# Altium PCB SPT3G_AdapterBoard.PcbDoc
Units mil, origin at the board's own origin, x right, y up, seen from the top; angles counter-clockwise.
Board outline 1437.49 x 1831.15 mil, 6 copper layers (Top Layer, Internal Plane 1, Signal Layer 1, Signal Layer 2, Internal Plane 2, Bottom Layer), stack 48.468 mil thick; 8 components, 17 nets, 43 pads, 128 vias.
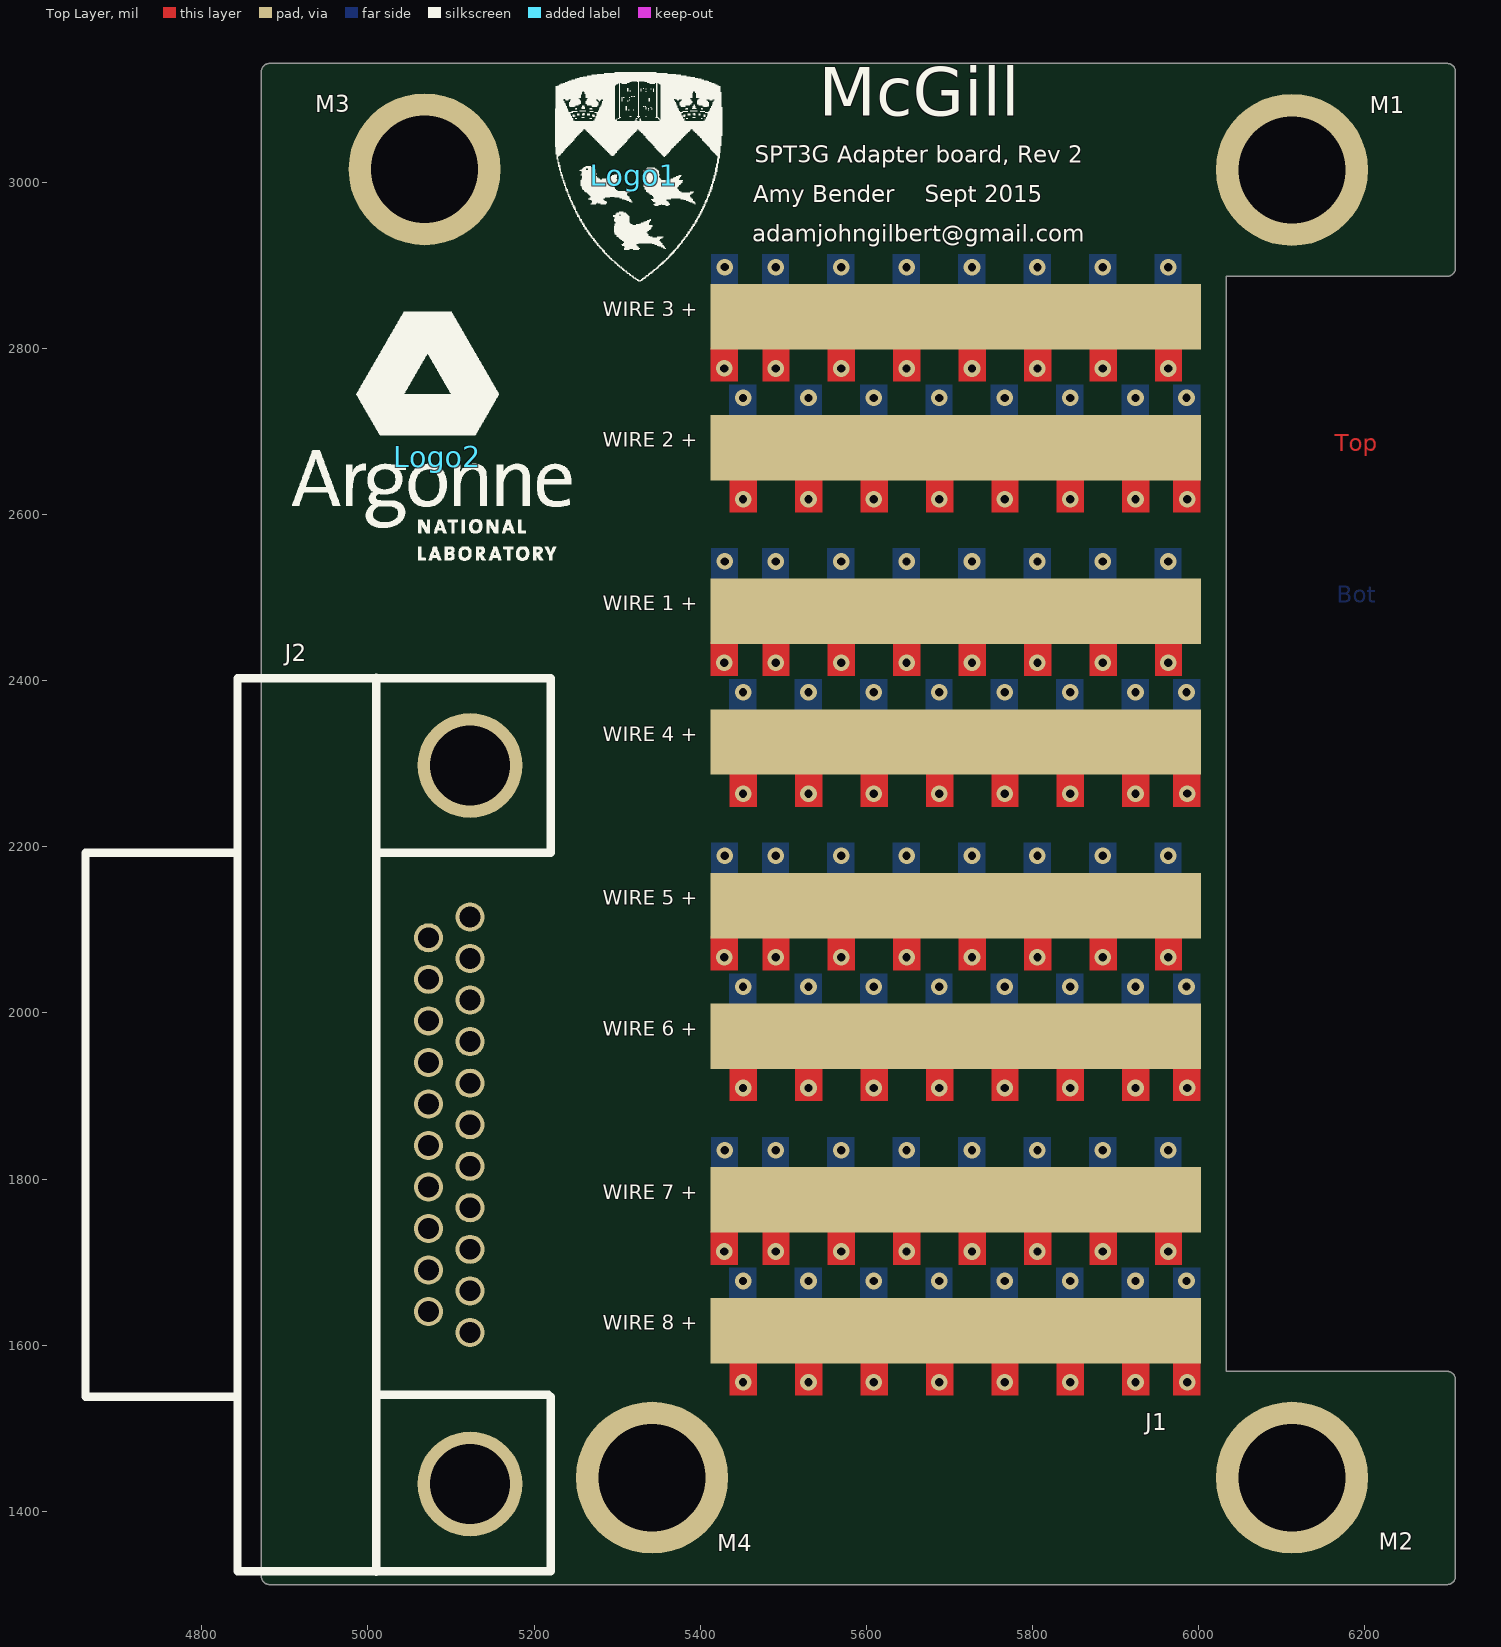
[diagram p0: Top Layer view]
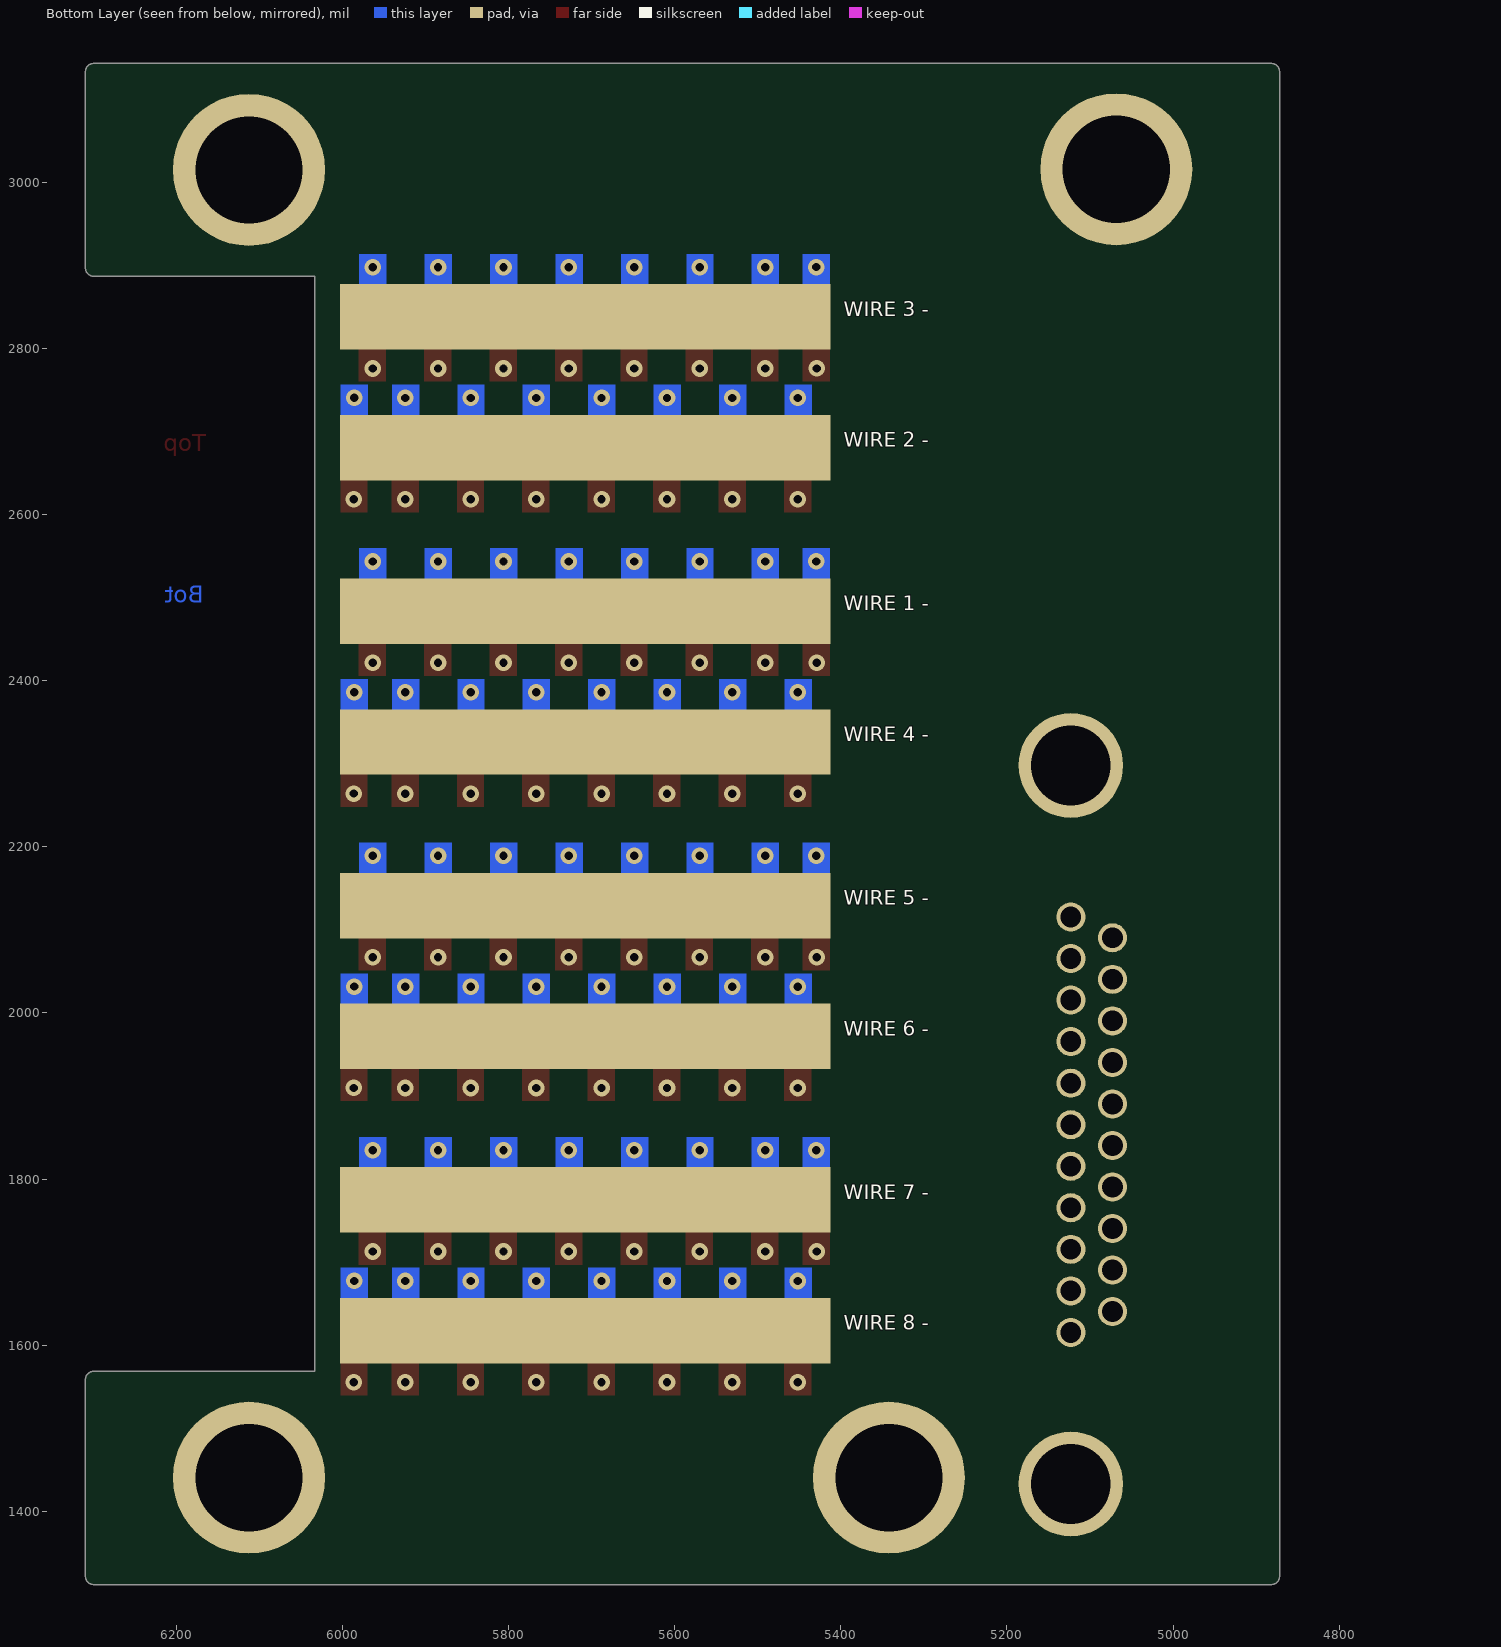
[diagram p1: Bottom Layer view, seen from below]
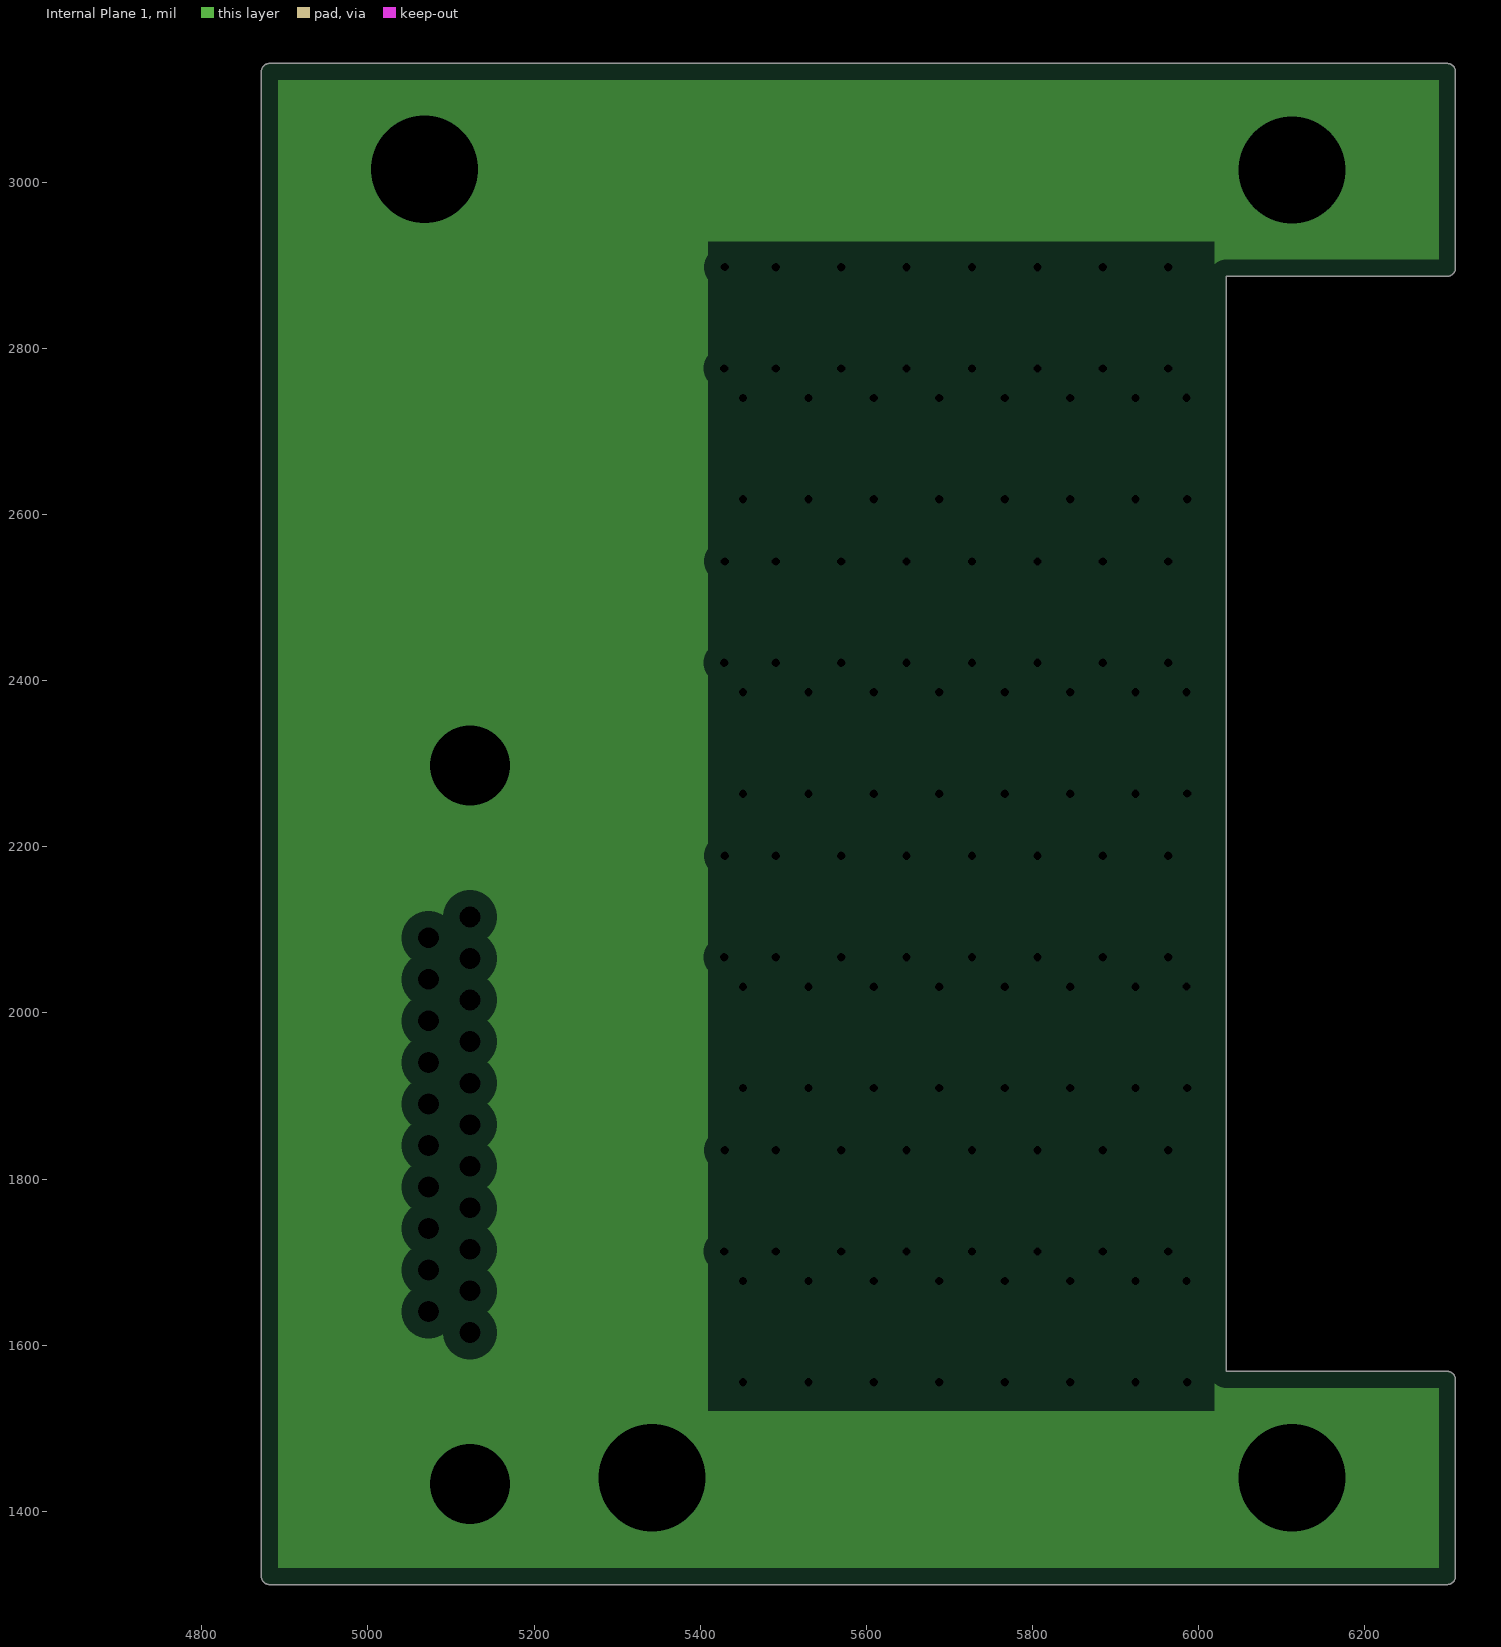
[diagram p2: Internal Plane 1, clearances drawn from the general rule]
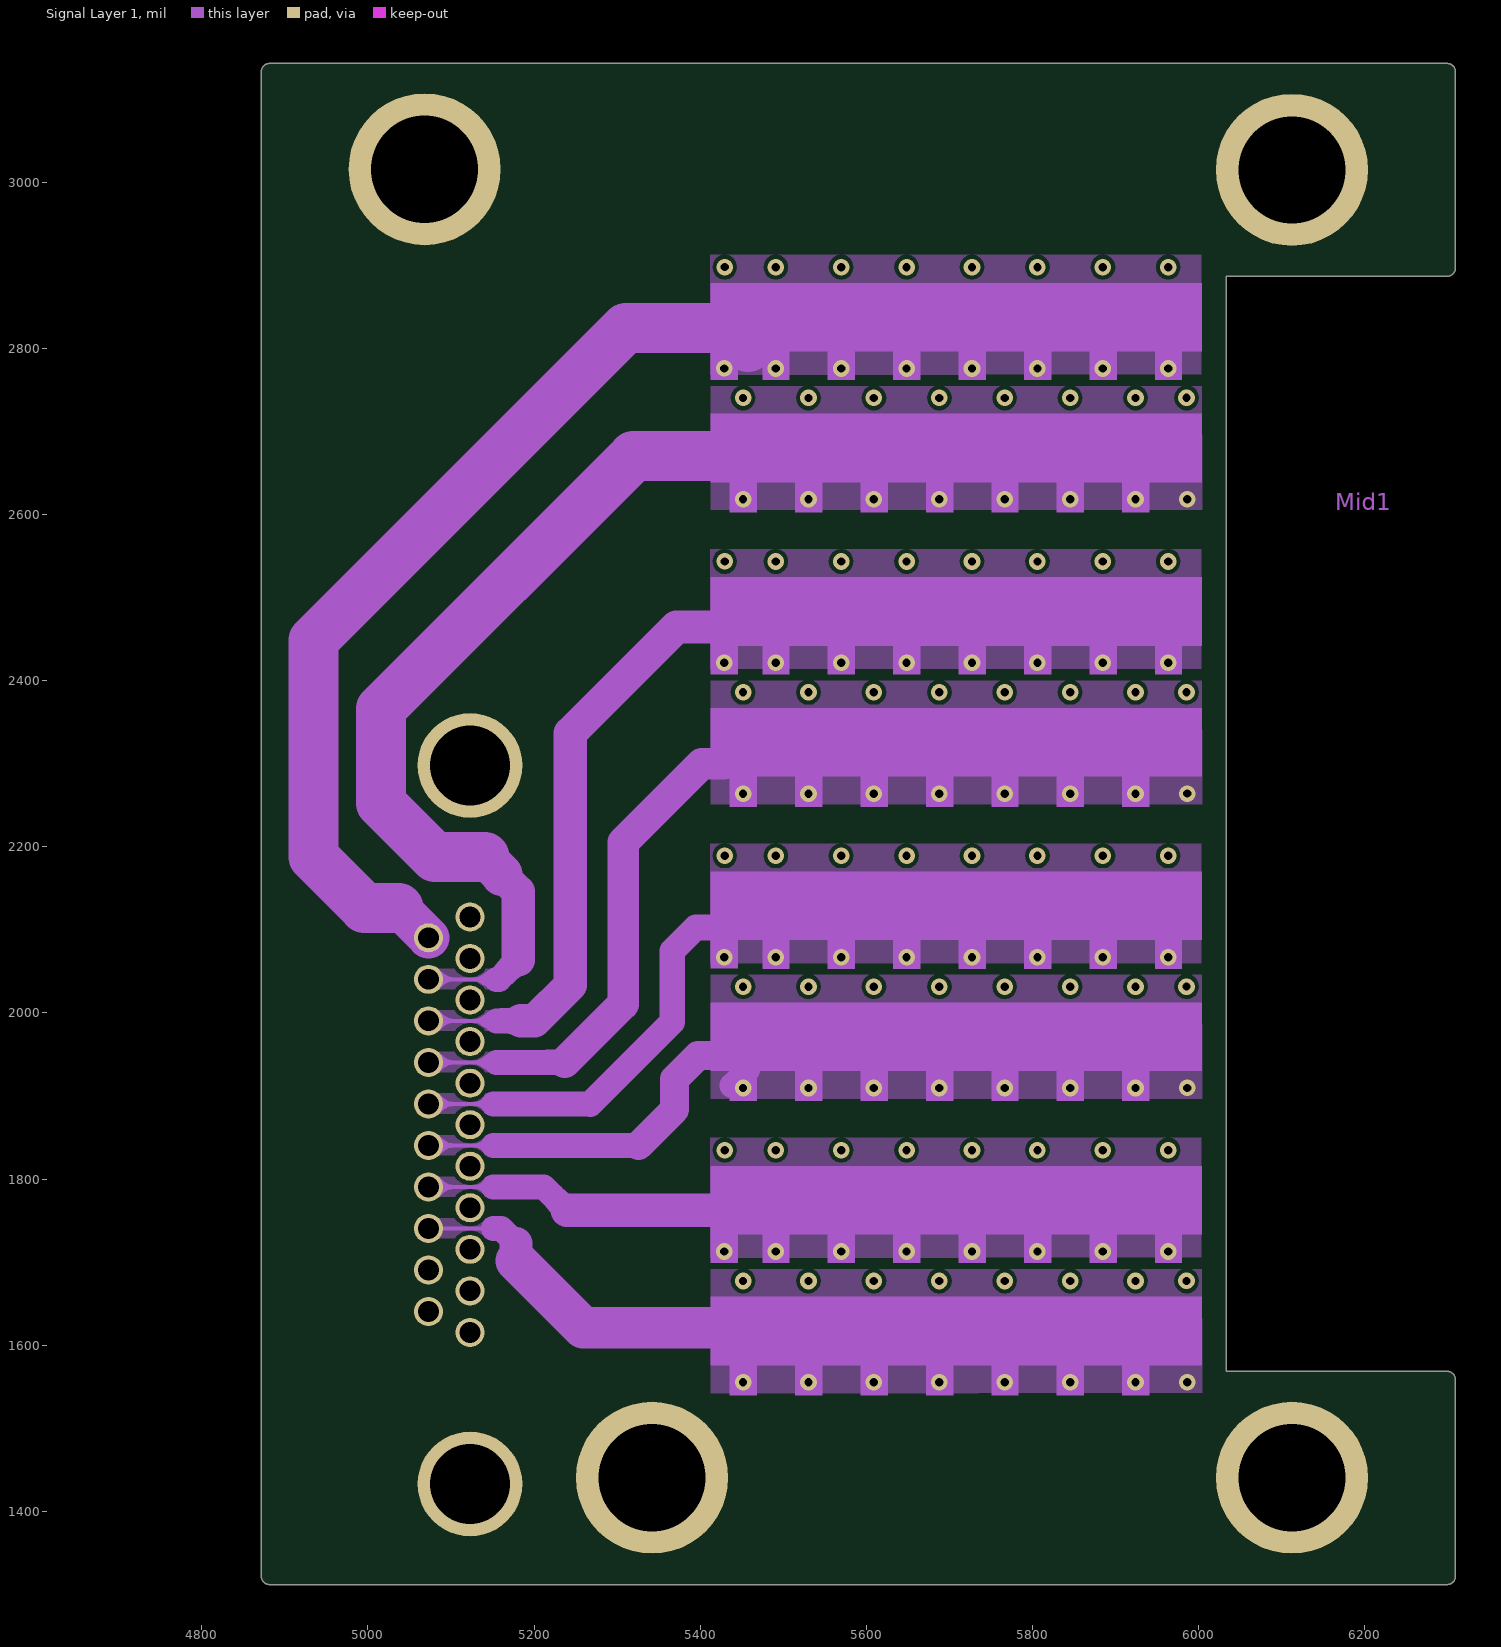
[diagram p3: Signal Layer 1]
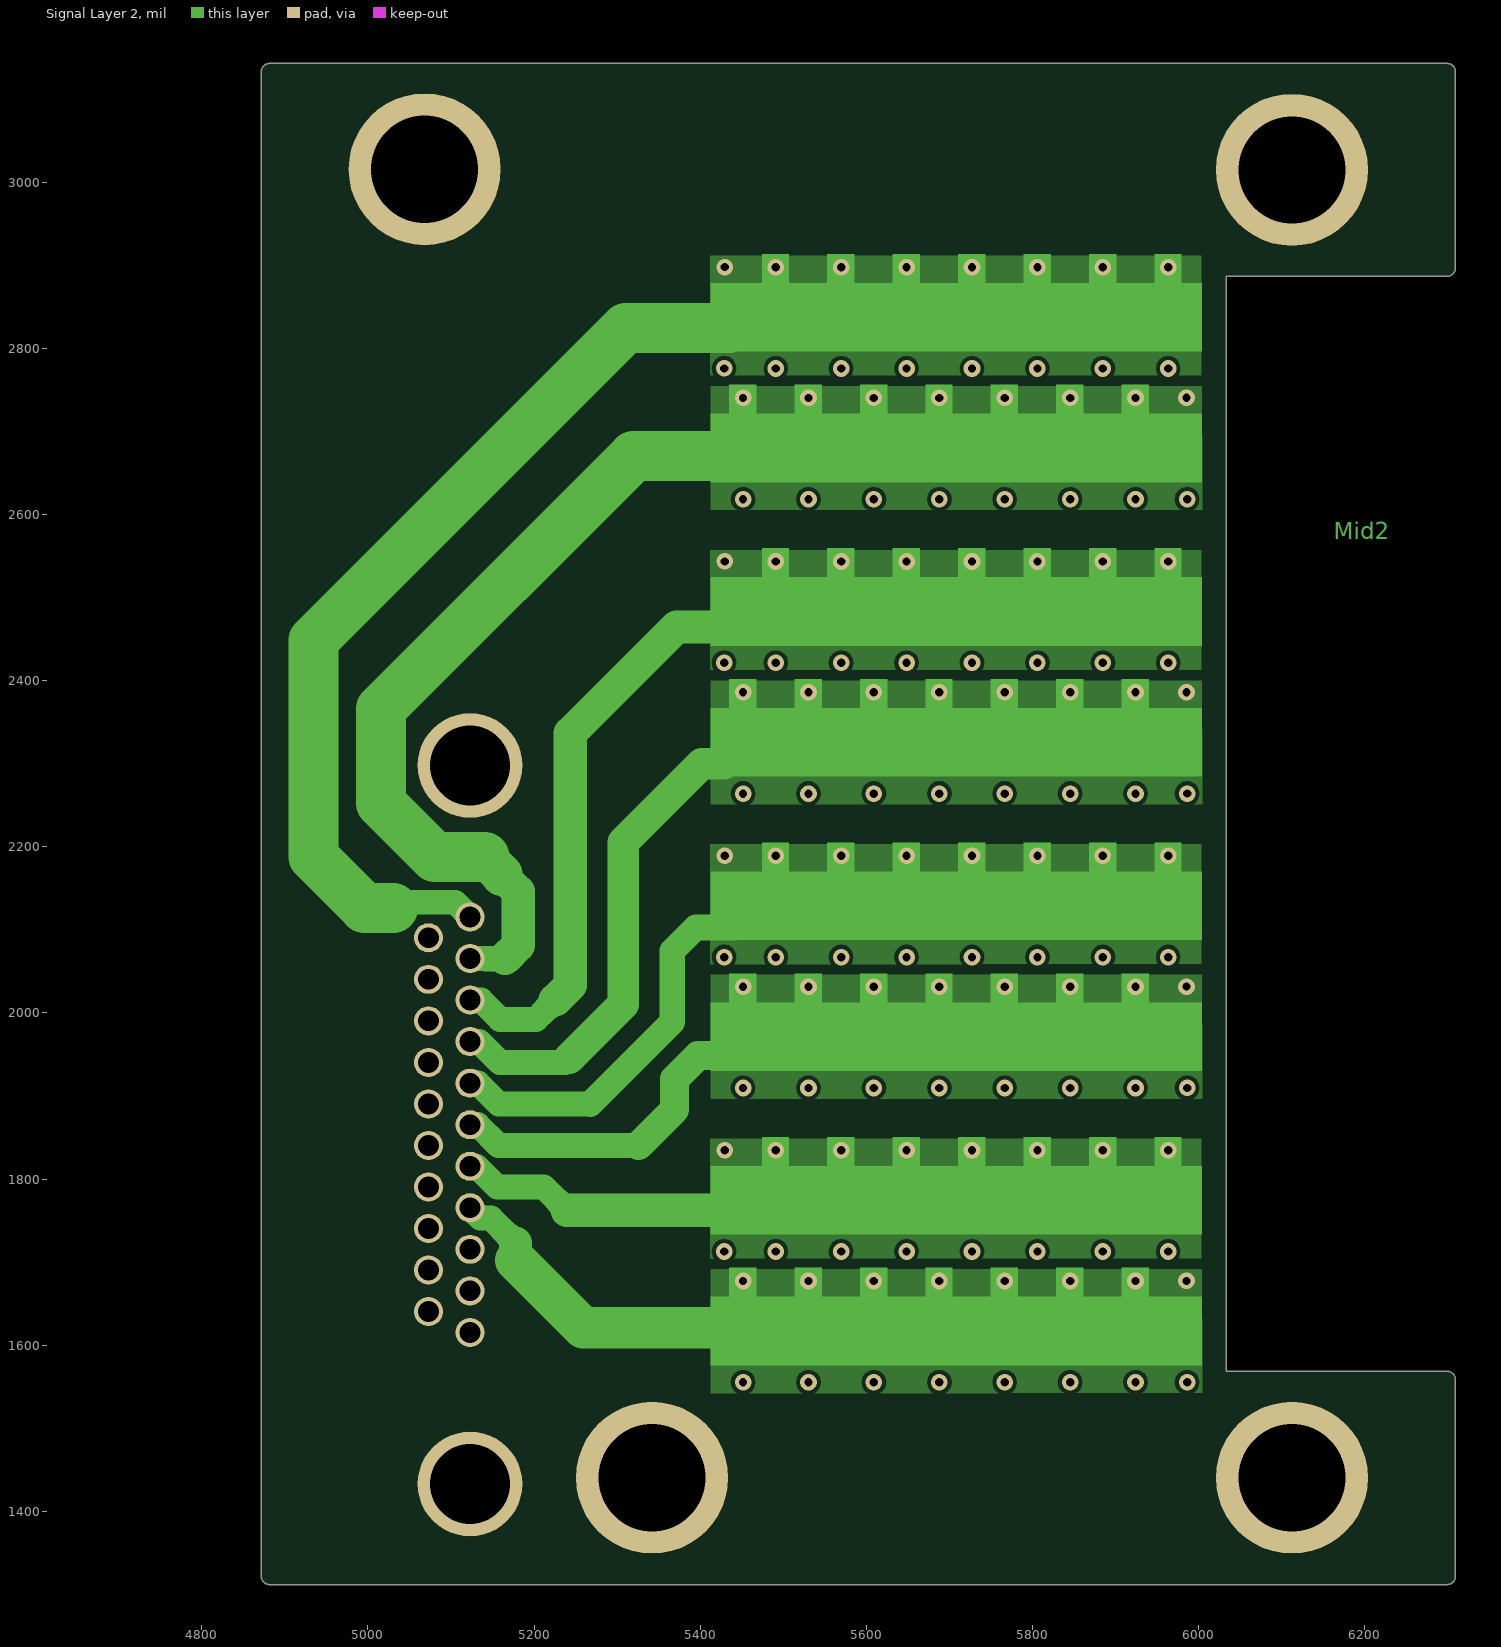
[diagram p4: Signal Layer 2]
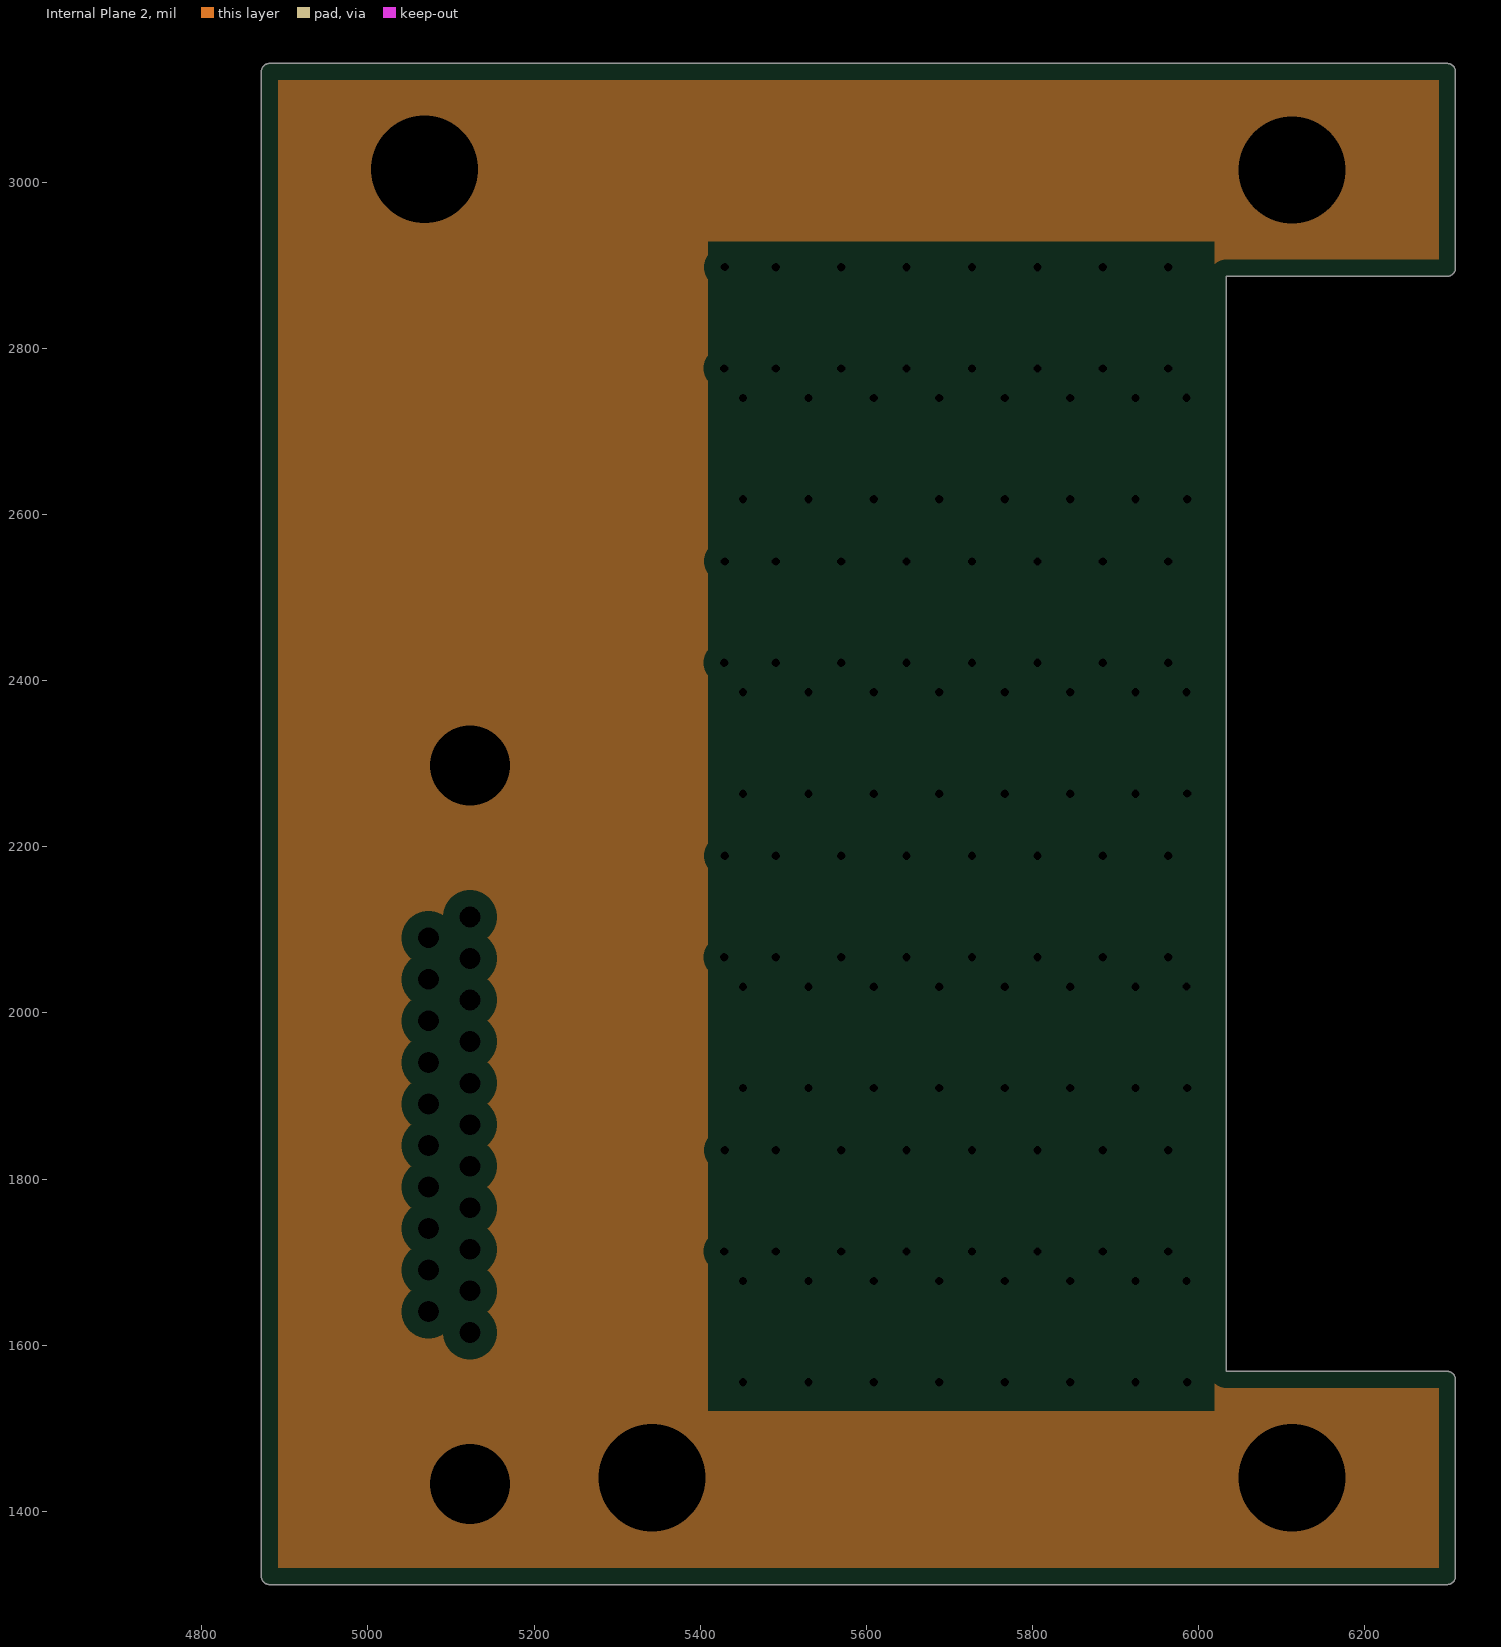
[diagram p5: Internal Plane 2, clearances drawn from the general rule]

## Layer stack, top to bottom
Top Solder: solder mask 0.4, Solder Resist, Dk 3.5
Top Layer: signal copper 1.4
Dielectric 1: core 10, FR-4, Dk 4.2
Internal Plane 1: plane copper 1.417, net GND
Dielectric 4: prepreg 5, Dk 4.2
Signal Layer 1: signal copper 1.417
Dielectric 3: core 10, Dk 4.2
Signal Layer 2: signal copper 1.417
Dielectric 5: prepreg 5, Dk 4.2
Internal Plane 2: plane copper 1.417, net GND
Dielectric 2: core 10, Dk 4.2
Bottom Layer: signal copper 1.4
Bottom Solder: solder mask 0.4, Solder Resist, Dk 3.5

## Board outline
4871.73,1321.95 ccw(c4881.75,1321.95) 4881.75,1311.94 6299.21,1311.94 ccw(c6299.21,1321.95) 6309.23,1321.95 ccw(c6299.21,1321.95) 6309.22,1322.2 ccw(c6299.21,1322.46) 6309.23,1322.46 6309.23,1558.68 ccw(c6299.21,1558.68) 6299.15,1568.69 6033.44,1568.69 6033.44,2886.84 6299.21,2886.84 ccw(c6299.21,2896.85) 6309.23,2896.85 6309.23,3133.07 ccw(c6299.21,3133.07) 6299.21,3143.09 4881.75,3143.09 ccw(c4881.75,3133.07) 4871.73,3133.07

## Design rules (kind name [scope] priority, off if disabled: settings)
Clearance Clearance_1 [All vs HasFootprint('McGillLogo1')] p1: gap=5
Clearance [All] p2: gap=5
ComponentClearance [(HasFootprint('ArgonneLogo') OR HasFootprint('MCGILLLOGO1'))] p1: gap=0 collisioncheckmode=3 verticalgap=0 showdistances=FALSE
ComponentClearance ComponentClearance_1 [All] p2: gap=10 collisioncheckmode=3 verticalgap=10 showdistances=FALSE
HoleSize [All] p1: absolutevalues=TRUE maxlimit=150 minlimit=1 maxpercent=80.000 minpercent=20.000
MinimumSolderMaskSliver [All] p1: minsoldermaskwidth=3
PlaneClearance [All] p1: clearance=20
PlaneConnect [All] p1: planeconnectstyle=Relief reliefexpansion=20 reliefentries=4 reliefconductorwidth=10 reliefairgap=10
PolygonConnect [All] p1: connectstyle=Direct reliefconductorwidth=10 reliefentries=4 polygonreliefangle="90 Angle" airgapwidth=10
RoutingVias [All] p1: holewidth=28 width=50 viastyle="Through Hole" minholewidth=10 minwidth=20 maxholewidth=28 maxwidth=50
SilkToBoardRegionClearance [All] p1 off:
SilkToSilkClearance [All] p1: silktosilkclearance=5
SolderMaskExpansion [All] p1: expansion=3
Width [All] p1: maxlimit=100 minlimit=5 preferedwidth=10 minimp=50.000000 maximp=50.000000 favimp=50.000000
23 further rules are at their usual default settings.

## Components (designator, comment, footprint, x,y, rotation, side; value= is the part's Value field where it differs from the comment)
J1 "Stripline16 2mm x 15mm pads" Stripline16 5707.66,2129.34 r180 top
J2 "Omnetics MMDS-021-B02-R2" MMDS-021-B02-R2 5122.99,1865.53 r90 top
Logo1 "McGillLogo" MCGILLLOGO1 5320.34,3008.35 r0 top
Logo2 "ArgonneLogo" ArgonneLogo 5083.72,2669.6 r0 top
M1 "MountingHole" MountingHole#1 6112.36,3014.96 r0 top
M2 "MountingHole" MountingHole#1 6112.36,1440.57 r0 top
M3 "MountingHole" MountingHole#2 5068.3,3014.96 r0 top
M4 "MountingHole" MountingHole#3 5342.06,1431.03 r0 top

## Footprints (in the part's own frame and the unit in brackets; to place one, negate y for a bottom-side part, rotate by r counter-clockwise, add the part's x,y. Pads: shape width x height; smd on the part's side, far side on the other; paste and mask are expansions set on the pad)
ArgonneLogo [mil]
  silkscreen extent -175,-125 161,174
MCGILLLOGO1 [mil] "McGillLogo"
  silkscreen extent -95,-127 106,124
MMDS-021-B02-R2 [mil] "Omnetrics21pinR2Tail"
  round 35 hole 25: 1(-250,0) 2(-200,0) 3(-150,0) 4(-100,0) 5(-50,0) 6(0,0) 7(50,0) 8(100,0) 9(150,0) 10(200,0) 11(250,0) 12(-225,50) 13(-175,50) 14(-125,50) 15(-75,50) 16(-25,50) 17(25,50) 18(75,50) 19(125,50) 20(175,50) 21(225,50)
  round 125.98 hole 96.06: MH1(-432.5,0) MH2(432.5,0)
  silkscreen extent -538,-97 538,463
MountingHole#1 [mil] "Mounting Hole"
  round 183 hole 129: 0(0,0)
MountingHole#2 [mil] "Mounting Hole"
  round 183 hole 129: 0(0,0.69)
MountingHole#3 [mil] "Mounting Hole"
  round 183 hole 129: 0(0,9.54)
Stripline16 [mm]
  rect 15x2 smd: 1(0,13) 3(0,9) 5(0,4) 7(0,0) 9(0,-5) 11(0,-9) 13(0,-14) 15(0,-18)
  rect 15x2 smd far side: 2(0,13) 4(0,9) 6(0,4) 8(0,0) 10(0,-5) 12(0,-9) 14(0,-14) 16(0,-18)

## Part data
J1: library part Stripline16
J2: library part OmneticsMicroD21, "OmneticsMicroD21"
Logo1 Logo2: library part Logo

## Via types
v1: diameter 20, hole 10, Top Layer to Bottom Layer, 128 vias

## Nets (pads, with @x,y where several pads share a name; then routed paths per layer and width w, separated by ;. In a path a pad name is that pad's centre, name@x,y a point inside that pad or via, vN(x,y) a via of type N, cw(c..) or ccw(c..) an arc to the next point about the centre after c; other vN are vias at no path point)
GND: J2.MH1 J2.MH2 M1.0 M2.0 M3.0 M4.0
WIRE_N1: J1.12 J2.9 | length 707.2
  Signal Layer 2 w30: J2.9 5135.99,2015.53 5159.15,1992.36 5202.4,1992.36 5225.57,2015.53
  Signal Layer 2 w40: 5225.57,2015.53 5243.64,2033.6 5243.64,2336.78 5371.41,2464.56 5447.42,2464.56
  other v1: 5429.62,2543.6 5491.03,2543.57 5569.77,2543.57 5648.51,2543.57 5727.25,2543.57 5805.99,2543.57 5884.73,2543.57 5963.47,2543.57
WIRE_N2: J1.14 J2.10 | length 980.9
  Signal Layer 2 w30: J2.10 5164.99,2065.53
  Signal Layer 2 w40: 5161.34,2165.76 5181,2146.09 5181,2081.54 5164.99,2065.53
  Signal Layer 2 w50: 5140.78,2187.72 5161.34,2167.16 5161.34,2165.76
  Signal Layer 2 w60: 5140.78,2187.72 5080.73,2187.72 5015.83,2252.62 5015.83,2366.22 5319.94,2670.32 5417.86,2670.32
  other v1: 5451.66,2740.43 5530.4,2740.43 5609.14,2740.43 5687.88,2740.43 5766.62,2740.43 5845.36,2740.43 5924.1,2740.43 5985.52,2740.45
WIRE_N3: J1.16 J2.11 | length 1140.5
  Signal Layer 2 w30: 5030.31,2126.61 5039.95,2126.61 5046.65,2133.3 5105.22,2133.3 J2.11
  Signal Layer 2 w60: 5030.31,2126.61 5030.26,2126.56 4995.96,2126.56 4934.49,2188.02 4934.49,2448.56 5310.57,2824.65 5434.54,2824.65
  other v1: 5429.62,2897.93 5491.03,2897.91 5569.77,2897.91 5648.51,2897.91 5727.25,2897.91 5805.99,2897.91 5884.73,2897.91 5963.47,2897.91
WIRE_N4: J1.10 J2.8 | length 578.7
  Signal Layer 2 w30: J2.8 5133.93,1965.53 5159.06,1940.4 5237.26,1940.4 5242.4,1945.54
  Signal Layer 2 w38: 5242.4,1945.54 5307.54,2010.68 5307.54,2205.49 5401.88,2299.83 5428.31,2299.83
  other v1: 5451.66,2386.09 5530.4,2386.09 5609.14,2386.09 5687.88,2386.09 5766.62,2386.09 5845.36,2386.09 5924.1,2386.09 5985.52,2386.12
WIRE_N5: J1.8 J2.7 | length 467
  Signal Layer 2 w30: J2.7 5132.5,1915.53 5157.5,1890.53 5267.71,1890.53
  Signal Layer 2 w31: 5267.71,1890.53 5366.29,1989.1 5366.29,2074.65 5394.61,2102.97 5441.54,2102.97
  other v1: 5429.62,2189.27 5491.03,2189.24 5569.77,2189.24 5648.51,2189.24 5727.25,2189.24 5805.99,2189.24 5884.73,2189.24 5963.47,2189.24
WIRE_N6: J1.6 J2.6 | length 402.7
  Signal Layer 2 w30: J2.6 5132.27,1865.53 5157.27,1840.53 5326,1840.53
  Signal Layer 2 w35: 5326,1840.53 5369.35,1883.87 5369.35,1920.58 5397.38,1948.61 5449.09,1948.61
  other v1: 5451.66,2031.76 5530.4,2031.76 5609.14,2031.76 5687.88,2031.76 5766.62,2031.76 5845.36,2031.76 5924.1,2031.76 5985.52,2031.79
WIRE_N7: J1.4 J2.5 | length 346.5
  Signal Layer 2 w30: J2.5 5130.78,1815.53 5155.78,1790.53 5211.76,1790.53 5239.87,1762.42
  Signal Layer 2 w40: 5239.87,1762.42 5447.48,1762.42
  other v1: 5429.62,1834.94 5491.03,1834.91 5569.77,1834.91 5648.51,1834.91 5727.25,1834.91 5805.99,1834.91 5884.73,1834.91 5963.47,1834.91
WIRE_N8: J1.2 J2.4 | length 379.9
  Signal Layer 2 w30: J2.4 5135.47,1753.05 5148.06,1753.05 5177.86,1723.25
  Signal Layer 2 w40: 5177.86,1702.1 5177.86,1723.25
  Signal Layer 2 w50: 5177.86,1702.1 5259.12,1620.84 5430.55,1620.84
  other v1: 5451.66,1677.43 5530.4,1677.43 5609.14,1677.43 5687.88,1677.43 5766.62,1677.43 5845.36,1677.43 5924.1,1677.43 5985.52,1677.46
WIRE_P1: J1.11 J2.19 | length 748.4
  Signal Layer 1 w5: J2.19 5147,1990.53
  Signal Layer 1 w20: 5147,1990.53 5155,1990.53
  Signal Layer 1 w30: 5155,1990.53 5184,1990.53
  Signal Layer 1 w40: 5184,1990.53 5200.57,1990.53 5243.64,2033.6 5243.64,2336.78 5371.41,2464.56 5447.42,2464.56
  other v1: 5428.92,2421.59 5491.03,2421.57 5569.77,2421.57 5648.51,2421.57 5727.25,2421.57 5805.99,2421.57 5884.73,2421.57 5963.47,2421.57
WIRE_P2: J1.13 J2.20 | length 1051.6
  Signal Layer 1 w5: J2.20 5147,2040.53
  Signal Layer 1 w20: 5147,2040.53 5155,2040.53
  Signal Layer 1 w30: 5155,2040.53 5157.71,2040.53 5180.97,2063.79
  Signal Layer 1 w40: 5161.34,2165.76 5180.97,2146.12 5180.97,2063.79
  Signal Layer 1 w50: 5140.78,2187.72 5161.34,2167.16 5161.34,2165.76
  Signal Layer 1 w60: 5140.78,2187.72 5080.73,2187.72 5015.83,2252.62 5015.83,2366.22 5319.94,2670.32 5417.86,2670.32
  other v1: 5451.66,2618.43 5530.4,2618.43 5609.14,2618.43 5687.88,2618.43 5766.62,2618.43 5845.36,2618.43 5924.1,2618.43 5986.21,2618.45
WIRE_P3: J1.15 J2.21 | length 1127.9
  Signal Layer 1 w50: 5036.96,2126.56 J2.21
  Signal Layer 1 w60: 5036.96,2126.56 4995.96,2126.56 4934.49,2188.02 4934.49,2448.56 5310.57,2824.65 5434.54,2824.65 5457.66,2801.53
  other v1: 5428.92,2775.93 5491.03,2775.91 5569.77,2775.91 5648.51,2775.91 5727.25,2775.91 5805.99,2775.91 5884.73,2775.91 5963.47,2775.91
WIRE_P4: J1.9 J2.18 | length 618.2
  Signal Layer 1 w5: J2.18 5147,1940.53
  Signal Layer 1 w20: 5147,1940.53 5155,1940.53
  Signal Layer 1 w30: 5155,1940.53 5237.22,1940.53
  Signal Layer 1 w38: 5237.22,1940.53 5307.54,2010.85 5307.54,2205.49 5401.88,2299.83 5428.31,2299.83
  other v1: 5451.66,2264.09 5530.4,2264.09 5609.14,2264.09 5687.88,2264.09 5766.62,2264.09 5845.36,2264.09 5924.1,2264.09 5986.21,2264.11
WIRE_P5: J1.7 J2.17 | length 539.9
  Signal Layer 1 w5: J2.17 5147,1890.53
  Signal Layer 1 w20: 5147,1890.53 5151.03,1890.53
  Signal Layer 1 w30: 5151.03,1890.53 5267.71,1890.53 ; 5449.97,2111.4 5449.97,2132.68
  Signal Layer 1 w31: 5267.71,1890.53 5366.29,1989.1 5366.29,2074.65 5394.61,2102.97 5441.54,2102.97 5449.97,2111.4
  other v1: 5428.92,2067.26 5491.03,2067.24 5569.77,2067.24 5648.51,2067.24 5727.25,2067.24 5805.99,2067.24 5884.73,2067.24 5963.47,2067.24
WIRE_P6: J1.5 J2.16 | length 469.3
  Signal Layer 1 w5: J2.16 5147,1840.53
  Signal Layer 1 w20: 5147,1840.53 5151.03,1840.53
  Signal Layer 1 w30: 5151.03,1840.53 5326,1840.53 ; 5438.02,1912.5 5457.07,1931.56
  Signal Layer 1 w35: 5326,1840.53 5369.35,1883.87 5369.35,1920.58 5397.38,1948.61 5449.09,1948.61
  other v1: 5451.66,1909.76 5530.4,1909.76 5609.14,1909.76 5687.88,1909.76 5766.62,1909.76 5845.36,1909.76 5924.1,1909.76 5986.21,1909.78
WIRE_P7: J1.3 J2.15 | length 408.6
  Signal Layer 1 w5: J2.15 5147,1790.53
  Signal Layer 1 w20: 5147,1790.53 5151.03,1790.53
  Signal Layer 1 w30: 5151.03,1790.53 5211.76,1790.53 5239.87,1762.42
  Signal Layer 1 w40: 5239.87,1762.42 5447.48,1762.42
  Signal Layer 1 w50: 5962.83,1762.42 5978.75,1778.35
  other v1: 5428.92,1712.93 5491.03,1712.91 5569.77,1712.91 5648.51,1712.91 5727.25,1712.91 5805.99,1712.91 5884.73,1712.91 5963.47,1712.91
WIRE_P8: J1.1 J2.14 | length 419.5
  Signal Layer 1 w5: J2.14 5147,1740.53
  Signal Layer 1 w20: 5147,1740.53 5151.03,1740.53
  Signal Layer 1 w30: 5151.03,1740.53 5160.59,1740.53 5178.44,1722.68
  Signal Layer 1 w40: 5178.44,1701.53 5178.44,1722.68
  Signal Layer 1 w50: 5178.44,1701.53 5259.12,1620.84 5430.55,1620.84
  other v1: 5451.66,1555.43 5530.4,1555.43 5609.14,1555.43 5687.88,1555.43 5766.62,1555.43 5845.36,1555.43 5924.1,1555.43 5986.21,1555.45
pads on no net: J2.1 J2.2 J2.3 J2.12 J2.13

## Polygon pours and split planes (outlines as drawn)
WIRE_P7 on Signal Layer 1 "Top Layer-No Net" (solid, pour order 274): 5412.34,1849.62 6003.34,1849.62 6003.5,1736.94 6003.5,1705.78 5733.34,1705.62 5413,1705.44 5412.34,1705.44
WIRE_P8 on Signal Layer 1 "Top Layer-No Net" (solid, pour order 272): 5413,1691.43 6003.99,1691.43 6004.16,1573.84 6004.16,1542.68 5734,1542.53 5414,1542.53 5413,1542.53
WIRE_P6 on Signal Layer 1 "Top Layer-No Net" (solid, pour order 270): 5413,2045.76 6003.99,2045.76 6004.16,1928.17 6004.16,1897.02 5734,1896.86 5414,1896.86 5413,1896.86
WIRE_P5 on Signal Layer 1 "Top Layer-No Net" (solid, pour order 268): 5412.34,2203.95 6003.34,2203.95 6003.5,2091.27 6003.5,2060.11 5733.34,2059.95 5413,2059.77 5412.34,2059.77
WIRE_P4 on Signal Layer 1 "Top Layer-No Net" (solid, pour order 266): 5413,2400.09 6003.99,2400.09 6004.16,2282.5 6004.16,2251.35 5734,2251.19 5414,2251.19 5413,2251.19
WIRE_P1 on Signal Layer 1 "Top Layer-No Net" (solid, pour order 264): 5412.34,2558.28 6003.34,2558.28 6003.5,2445.6 6003.5,2414.44 5733.34,2414.28 5413,2414.1 5412.34,2414.1
WIRE_P2 on Signal Layer 1 "Top Layer-No Net" (solid, pour order 262): 5413,2754.43 6003.99,2754.43 6004.16,2636.83 6004.16,2605.68 5734,2605.52 5414,2605.52 5413,2605.52
WIRE_P3 on Signal Layer 1 "Top Layer-No Net" (solid, pour order 260): 5412.34,2912.61 6003.34,2912.61 6003.5,2799.93 6003.5,2768.77 5733.34,2768.61 5413,2768.43 5412.34,2768.43
WIRE_P4 on Signal Layer 1 "Top Layer-No Net" (solid, pour order 210): 5145.94,1928.4 5145.78,1928.55 5091.35,1928.55 5084.97,1928.55 5072.99,1940.53 5085.56,1953.1 5133.13,1953.1 5145.94,1953.1
WIRE_P1 on Signal Layer 1 "Top Layer-No Net" (solid, pour order 208): 5145.94,1978.4 5145.78,1978.55 5091.35,1978.55 5084.97,1978.55 5072.99,1990.53 5085.56,2003.1 5133.13,2003.1 5145.94,2003.1
WIRE_P2 on Signal Layer 1 "Top Layer-No Net" (solid, pour order 206): 5145.94,2028.4 5145.78,2028.55 5091.35,2028.55 5084.97,2028.55 5072.99,2040.53 5085.56,2053.1 5133.13,2053.1 5145.94,2053.1
WIRE_P7 on Signal Layer 1 "Top Layer-No Net" (solid, pour order 204): 5145.94,1778.4 5145.78,1778.55 5091.35,1778.55 5084.97,1778.55 5072.99,1790.53 5085.56,1803.1 5133.13,1803.1 5145.94,1803.1
WIRE_P6 on Signal Layer 1 "Top Layer-No Net" (solid, pour order 202): 5145.94,1828.4 5145.78,1828.55 5091.35,1828.55 5084.97,1828.55 5072.99,1840.53 5085.56,1853.1 5133.13,1853.1 5145.94,1853.1
WIRE_P5 on Signal Layer 1 "Top Layer-No Net" (solid, pour order 200): 5145.94,1878.4 5145.78,1878.55 5091.35,1878.55 5084.97,1878.55 5072.99,1890.53 5085.56,1903.1 5133.13,1903.1 5145.94,1903.1
WIRE_P8 on Signal Layer 1 "Top Layer-No Net" (solid, pour order 198): 5145.94,1728.4 5145.78,1728.55 5091.35,1728.55 5084.97,1728.55 5072.99,1740.53 5085.56,1753.1 5133.13,1753.1 5145.94,1753.1
WIRE_N8 on Signal Layer 2 "Top Layer-No Net" (solid, pour order 290): 5413,1691.43 6003.99,1691.43 6004.16,1573.84 6004.16,1542.68 5734,1542.53 5414,1542.53 5413,1542.53
WIRE_N7 on Signal Layer 2 "Top Layer-No Net" (solid, pour order 288): 5412.34,1848.62 6003.34,1848.62 6003.5,1735.94 6003.5,1704.78 5733.34,1704.62 5413,1704.44 5412.34,1704.44
WIRE_N5 on Signal Layer 2 "Top Layer-No Net" (solid, pour order 286): 5412.34,2202.95 6003.34,2202.95 6003.5,2090.27 6003.5,2059.11 5733.34,2058.95 5413,2058.77 5412.34,2058.77
WIRE_N6 on Signal Layer 2 "Top Layer-No Net" (solid, pour order 284): 5413,2045.76 6003.99,2045.76 6004.16,1928.17 6004.16,1897.02 5734,1896.86 5414,1896.86 5413,1896.86
WIRE_N1 on Signal Layer 2 "Top Layer-No Net" (solid, pour order 282): 5412.34,2557.28 6003.34,2557.28 6003.5,2444.6 6003.5,2413.44 5733.34,2413.28 5413,2413.1 5412.34,2413.1
WIRE_N4 on Signal Layer 2 "Top Layer-No Net" (solid, pour order 280): 5413,2400.09 6003.99,2400.09 6004.16,2282.5 6004.16,2251.35 5734,2251.19 5414,2251.19 5413,2251.19
WIRE_N3 on Signal Layer 2 "Top Layer-No Net" (solid, pour order 278): 5412.34,2911.61 6003.34,2911.61 6003.5,2798.93 6003.5,2767.77 5733.34,2767.61 5413,2767.43 5412.34,2767.43
WIRE_N2 on Signal Layer 2 "Top Layer-No Net" (solid, pour order 276): 5413,2754.43 6003.99,2754.43 6004.16,2636.83 6004.16,2605.68 5734,2605.52 5414,2605.52 5413,2605.52
GND on Internal Plane 1 (split plane): 6289.13,2906.93 6033.44,2906.93 6029.52,2906.55 6025.75,2905.4 6022.27,2903.55 6019.23,2901.05 6018.99,2900.75 6018.99,2928.27 5409.55,2928.27 5409.55,1521.47 6018.99,1521.47 6018.99,1554.78 6019.23,1554.48 6022.27,1551.98 6025.75,1550.12 6029.52,1548.98 6033.44,1548.6 6289.13,1548.6 6289.13,1332.03 4891.83,1332.03 4891.83,3122.99 6289.13,3122.99
GND on Internal Plane 2 (split plane): 6289.13,2906.93 6033.44,2906.93 6029.52,2906.55 6025.75,2905.4 6022.27,2903.55 6019.23,2901.05 6018.99,2900.75 6018.99,2928.27 5409.55,2928.27 5409.55,1521.47 6018.99,1521.47 6018.99,1554.78 6019.23,1554.48 6022.27,1551.98 6025.75,1550.12 6029.52,1548.98 6033.44,1548.6 6289.13,1548.6 6289.13,1332.03 4891.83,1332.03 4891.83,3122.99 6289.13,3122.99

## Other copper
Top Layer:
  rectangle net WIRE_P8: 5969.39,1539.45 6002.39,1580.86
  rectangle net WIRE_P6: 5969.39,1893.78 6002.39,1935.19
  rectangle net WIRE_P4: 5969.39,2248.11 6002.39,2289.52
  rectangle net WIRE_P2: 5969.39,2602.45 6002.39,2643.85
  region net WIRE_P7: 5445.74,1738.34 5412.74,1738.34 5412.74,1696.93 5445.74,1696.93
  region net WIRE_P5: 5445.74,2092.67 5412.74,2092.67 5412.74,2051.26 5445.74,2051.26
  region net WIRE_P1: 5445.74,2447 5412.74,2447 5412.74,2405.59 5445.74,2405.59
  region net WIRE_P3: 5445.74,2801.33 5412.74,2801.33 5412.74,2759.93 5445.74,2759.93
  region net WIRE_P2: 5468.48,2643.83 5435.48,2643.83 5435.48,2602.43 5468.48,2602.43
  region net WIRE_P2: 5547.22,2643.83 5514.22,2643.83 5514.22,2602.43 5547.22,2602.43
  region net WIRE_P2: 5625.96,2643.83 5592.96,2643.83 5592.96,2602.43 5625.96,2602.43
  region net WIRE_P2: 5704.7,2643.83 5671.7,2643.83 5671.7,2602.43 5704.7,2602.43
  region net WIRE_P2: 5783.44,2643.83 5750.44,2643.83 5750.44,2602.43 5783.44,2602.43
  region net WIRE_P2: 5862.18,2643.83 5829.18,2643.83 5829.18,2602.43 5862.18,2602.43
  region net WIRE_P2: 5940.92,2643.83 5907.92,2643.83 5907.92,2602.43 5940.92,2602.43
  region net WIRE_P3: 5980.29,2801.31 5947.29,2801.31 5947.29,2759.91 5980.29,2759.91
  region net WIRE_P3: 5901.55,2801.31 5868.55,2801.31 5868.55,2759.91 5901.55,2759.91
  region net WIRE_P3: 5822.81,2801.31 5789.81,2801.31 5789.81,2759.91 5822.81,2759.91
  region net WIRE_P3: 5744.07,2801.31 5711.07,2801.31 5711.07,2759.91 5744.07,2759.91
  region net WIRE_P3: 5665.33,2801.31 5632.33,2801.31 5632.33,2759.91 5665.33,2759.91
  region net WIRE_P3: 5586.59,2801.31 5553.59,2801.31 5553.59,2759.91 5586.59,2759.91
  region net WIRE_P3: 5507.85,2801.31 5474.85,2801.31 5474.85,2759.91 5507.85,2759.91
  region net WIRE_P4: 5468.48,2289.5 5435.48,2289.5 5435.48,2248.09 5468.48,2248.09
  region net WIRE_P4: 5547.22,2289.5 5514.22,2289.5 5514.22,2248.09 5547.22,2248.09
  region net WIRE_P4: 5625.96,2289.5 5592.96,2289.5 5592.96,2248.09 5625.96,2248.09
  region net WIRE_P4: 5704.7,2289.5 5671.7,2289.5 5671.7,2248.09 5704.7,2248.09
  region net WIRE_P4: 5783.44,2289.5 5750.44,2289.5 5750.44,2248.09 5783.44,2248.09
  region net WIRE_P4: 5862.18,2289.5 5829.18,2289.5 5829.18,2248.09 5862.18,2248.09
  region net WIRE_P4: 5940.92,2289.5 5907.92,2289.5 5907.92,2248.09 5940.92,2248.09
  region net WIRE_P1: 5980.29,2446.98 5947.29,2446.98 5947.29,2405.57 5980.29,2405.57
  region net WIRE_P1: 5901.55,2446.98 5868.55,2446.98 5868.55,2405.57 5901.55,2405.57
  region net WIRE_P1: 5822.81,2446.98 5789.81,2446.98 5789.81,2405.57 5822.81,2405.57
  region net WIRE_P1: 5744.07,2446.98 5711.07,2446.98 5711.07,2405.57 5744.07,2405.57
  region net WIRE_P1: 5665.33,2446.98 5632.33,2446.98 5632.33,2405.57 5665.33,2405.57
  region net WIRE_P1: 5586.59,2446.98 5553.59,2446.98 5553.59,2405.57 5586.59,2405.57
  region net WIRE_P1: 5507.85,2446.98 5474.85,2446.98 5474.85,2405.57 5507.85,2405.57
  region net WIRE_P6: 5468.48,1935.17 5435.48,1935.17 5435.48,1893.76 5468.48,1893.76
  region net WIRE_P6: 5547.22,1935.17 5514.22,1935.17 5514.22,1893.76 5547.22,1893.76
  region net WIRE_P6: 5625.96,1935.17 5592.96,1935.17 5592.96,1893.76 5625.96,1893.76
  region net WIRE_P6: 5704.7,1935.17 5671.7,1935.17 5671.7,1893.76 5704.7,1893.76
  region net WIRE_P6: 5783.44,1935.17 5750.44,1935.17 5750.44,1893.76 5783.44,1893.76
  region net WIRE_P6: 5862.18,1935.17 5829.18,1935.17 5829.18,1893.76 5862.18,1893.76
  region net WIRE_P6: 5940.92,1935.17 5907.92,1935.17 5907.92,1893.76 5940.92,1893.76
  region net WIRE_P5: 5980.29,2092.65 5947.29,2092.65 5947.29,2051.24 5980.29,2051.24
  region net WIRE_P5: 5901.55,2092.65 5868.55,2092.65 5868.55,2051.24 5901.55,2051.24
  region net WIRE_P5: 5822.81,2092.65 5789.81,2092.65 5789.81,2051.24 5822.81,2051.24
  region net WIRE_P5: 5744.07,2092.65 5711.07,2092.65 5711.07,2051.24 5744.07,2051.24
  region net WIRE_P5: 5665.33,2092.65 5632.33,2092.65 5632.33,2051.24 5665.33,2051.24
  region net WIRE_P5: 5586.59,2092.65 5553.59,2092.65 5553.59,2051.24 5586.59,2051.24
  region net WIRE_P5: 5507.85,2092.65 5474.85,2092.65 5474.85,2051.24 5507.85,2051.24
  region net WIRE_P7: 5507.85,1738.32 5474.85,1738.32 5474.85,1696.91 5507.85,1696.91
  region net WIRE_P7: 5586.59,1738.32 5553.59,1738.32 5553.59,1696.91 5586.59,1696.91
  region net WIRE_P7: 5665.33,1738.32 5632.33,1738.32 5632.33,1696.91 5665.33,1696.91
  region net WIRE_P7: 5744.07,1738.32 5711.07,1738.32 5711.07,1696.91 5744.07,1696.91
  region net WIRE_P7: 5822.81,1738.32 5789.81,1738.32 5789.81,1696.91 5822.81,1696.91
  region net WIRE_P7: 5901.55,1738.32 5868.55,1738.32 5868.55,1696.91 5901.55,1696.91
  region net WIRE_P7: 5980.29,1738.32 5947.29,1738.32 5947.29,1696.91 5980.29,1696.91
  region net WIRE_P8: 5940.92,1580.84 5907.92,1580.84 5907.92,1539.43 5940.92,1539.43
  region net WIRE_P8: 5862.18,1580.84 5829.18,1580.84 5829.18,1539.43 5862.18,1539.43
  region net WIRE_P8: 5783.44,1580.84 5750.44,1580.84 5750.44,1539.43 5783.44,1539.43
  region net WIRE_P8: 5704.7,1580.84 5671.7,1580.84 5671.7,1539.43 5704.7,1539.43
  region net WIRE_P8: 5625.96,1580.84 5592.96,1580.84 5592.96,1539.43 5625.96,1539.43
  region net WIRE_P8: 5547.22,1580.84 5514.22,1580.84 5514.22,1539.43 5547.22,1539.43
  region net WIRE_P8: 5468.48,1580.84 5435.48,1580.84 5435.48,1539.43 5468.48,1539.43
  text "Top" at 6164,2676 h20
Signal Layer 1:
  region net WIRE_P7: 5445.74,1740.34 5412.74,1740.34 5412.74,1698.93 5445.74,1698.93
  region net WIRE_P5: 5445.74,2094.67 5412.74,2094.67 5412.74,2053.26 5445.74,2053.26
  region net WIRE_P1: 5445.74,2449 5412.74,2449 5412.74,2407.59 5445.74,2407.59
  region net WIRE_P3: 5445.74,2803.33 5412.74,2803.33 5412.74,2761.93 5445.74,2761.93
  region net WIRE_P8: 6004.16,1658.43 5412.16,1658.43 5412.16,1575.84 6004.16,1575.84
  region net WIRE_P7: 5507.85,1740.32 5474.85,1740.32 5474.85,1698.91 5507.85,1698.91
  region net WIRE_P7: 5586.59,1740.32 5553.59,1740.32 5553.59,1698.91 5586.59,1698.91
  region net WIRE_P7: 5665.33,1740.32 5632.33,1740.32 5632.33,1698.91 5665.33,1698.91
  region net WIRE_P7: 5744.07,1740.32 5711.07,1740.32 5711.07,1698.91 5744.07,1698.91
  region net WIRE_P7: 5822.81,1740.32 5789.81,1740.32 5789.81,1698.91 5822.81,1698.91
  region net WIRE_P7: 5901.55,1740.32 5868.55,1740.32 5868.55,1698.91 5901.55,1698.91
  region net WIRE_P7: 5980.29,1740.32 5947.29,1740.32 5947.29,1698.91 5980.29,1698.91
  region net WIRE_P7: 6004.16,1815.91 5412.16,1815.91 5412.16,1733.32 6004.16,1733.32
  region net WIRE_P5: 6004.16,2170.24 5412.16,2170.24 5412.16,2087.65 6004.16,2087.65
  region net WIRE_P5: 5980.29,2094.65 5947.29,2094.65 5947.29,2053.24 5980.29,2053.24
  region net WIRE_P5: 5901.55,2094.65 5868.55,2094.65 5868.55,2053.24 5901.55,2053.24
  region net WIRE_P5: 5822.81,2094.65 5789.81,2094.65 5789.81,2053.24 5822.81,2053.24
  region net WIRE_P5: 5744.07,2094.65 5711.07,2094.65 5711.07,2053.24 5744.07,2053.24
  region net WIRE_P5: 5665.33,2094.65 5632.33,2094.65 5632.33,2053.24 5665.33,2053.24
  region net WIRE_P5: 5586.59,2094.65 5553.59,2094.65 5553.59,2053.24 5586.59,2053.24
  region net WIRE_P5: 5507.85,2094.65 5474.85,2094.65 5474.85,2053.24 5507.85,2053.24
  region net WIRE_P6: 5940.92,1935.17 5907.92,1935.17 5907.92,1893.76 5940.92,1893.76
  region net WIRE_P6: 5862.18,1935.17 5829.18,1935.17 5829.18,1893.76 5862.18,1893.76
  region net WIRE_P6: 5783.44,1935.17 5750.44,1935.17 5750.44,1893.76 5783.44,1893.76
  region net WIRE_P6: 5704.7,1935.17 5671.7,1935.17 5671.7,1893.76 5704.7,1893.76
  region net WIRE_P6: 5625.96,1935.17 5592.96,1935.17 5592.96,1893.76 5625.96,1893.76
  region net WIRE_P6: 5547.22,1935.17 5514.22,1935.17 5514.22,1893.76 5547.22,1893.76
  region net WIRE_P6: 6004.16,2012.76 5412.16,2012.76 5412.16,1930.17 6004.16,1930.17
  region net WIRE_P6: 5468.48,1935.17 5435.48,1935.17 5435.48,1893.76 5468.48,1893.76
  region net WIRE_P1: 6004.16,2524.57 5412.16,2524.57 5412.16,2441.98 6004.16,2441.98
  region net WIRE_P1: 5980.29,2448.98 5947.29,2448.98 5947.29,2407.57 5980.29,2407.57
  region net WIRE_P1: 5901.55,2448.98 5868.55,2448.98 5868.55,2407.57 5901.55,2407.57
  region net WIRE_P1: 5822.81,2448.98 5789.81,2448.98 5789.81,2407.57 5822.81,2407.57
  region net WIRE_P1: 5744.07,2448.98 5711.07,2448.98 5711.07,2407.57 5744.07,2407.57
  region net WIRE_P1: 5665.33,2448.98 5632.33,2448.98 5632.33,2407.57 5665.33,2407.57
  region net WIRE_P1: 5586.59,2448.98 5553.59,2448.98 5553.59,2407.57 5586.59,2407.57
  region net WIRE_P1: 5507.85,2448.98 5474.85,2448.98 5474.85,2407.57 5507.85,2407.57
  region net WIRE_P4: 5940.92,2289.5 5907.92,2289.5 5907.92,2248.09 5940.92,2248.09
  region net WIRE_P4: 5862.18,2289.5 5829.18,2289.5 5829.18,2248.09 5862.18,2248.09
  region net WIRE_P4: 5783.44,2289.5 5750.44,2289.5 5750.44,2248.09 5783.44,2248.09
  region net WIRE_P4: 5704.7,2289.5 5671.7,2289.5 5671.7,2248.09 5704.7,2248.09
  region net WIRE_P4: 5625.96,2289.5 5592.96,2289.5 5592.96,2248.09 5625.96,2248.09
  region net WIRE_P4: 5547.22,2289.5 5514.22,2289.5 5514.22,2248.09 5547.22,2248.09
  region net WIRE_P4: 6004.16,2367.09 5412.16,2367.09 5412.16,2284.5 6004.16,2284.5
  region net WIRE_P4: 5468.48,2289.5 5435.48,2289.5 5435.48,2248.09 5468.48,2248.09
  region net WIRE_P3: 6004.16,2878.91 5412.16,2878.91 5412.16,2796.31 6004.16,2796.31
  region net WIRE_P3: 5980.29,2803.31 5947.29,2803.31 5947.29,2761.91 5980.29,2761.91
  region net WIRE_P3: 5901.55,2803.31 5868.55,2803.31 5868.55,2761.91 5901.55,2761.91
  region net WIRE_P3: 5822.81,2803.31 5789.81,2803.31 5789.81,2761.91 5822.81,2761.91
  region net WIRE_P3: 5744.07,2803.31 5711.07,2803.31 5711.07,2761.91 5744.07,2761.91
  region net WIRE_P3: 5665.33,2803.31 5632.33,2803.31 5632.33,2761.91 5665.33,2761.91
  region net WIRE_P3: 5586.59,2803.31 5553.59,2803.31 5553.59,2761.91 5586.59,2761.91
  region net WIRE_P3: 5507.85,2803.31 5474.85,2803.31 5474.85,2761.91 5507.85,2761.91
  region net WIRE_P2: 5940.92,2643.83 5907.92,2643.83 5907.92,2602.43 5940.92,2602.43
  region net WIRE_P2: 5862.18,2643.83 5829.18,2643.83 5829.18,2602.43 5862.18,2602.43
  region net WIRE_P2: 5783.44,2643.83 5750.44,2643.83 5750.44,2602.43 5783.44,2602.43
  region net WIRE_P2: 5704.7,2643.83 5671.7,2643.83 5671.7,2602.43 5704.7,2602.43
  region net WIRE_P2: 5625.96,2643.83 5592.96,2643.83 5592.96,2602.43 5625.96,2602.43
  region net WIRE_P2: 5547.22,2643.83 5514.22,2643.83 5514.22,2602.43 5547.22,2602.43
  region net WIRE_P2: 6004.16,2721.43 5412.16,2721.43 5412.16,2638.83 6004.16,2638.83
  region net WIRE_P2: 5468.48,2643.83 5435.48,2643.83 5435.48,2602.43 5468.48,2602.43
  region net WIRE_P8: 5940.92,1580.84 5907.92,1580.84 5907.92,1539.43 5940.92,1539.43
  region net WIRE_P8: 5862.18,1580.84 5829.18,1580.84 5829.18,1539.43 5862.18,1539.43
  region net WIRE_P8: 5783.44,1580.84 5750.44,1580.84 5750.44,1539.43 5783.44,1539.43
  region net WIRE_P8: 5704.7,1580.84 5671.7,1580.84 5671.7,1539.43 5704.7,1539.43
  region net WIRE_P8: 5625.96,1580.84 5592.96,1580.84 5592.96,1539.43 5625.96,1539.43
  region net WIRE_P8: 5547.22,1580.84 5514.22,1580.84 5514.22,1539.43 5547.22,1539.43
  region net WIRE_P8: 5468.48,1580.84 5435.48,1580.84 5435.48,1539.43 5468.48,1539.43
  text "Mid1" at 6164.57,2605.46 h20
Signal Layer 2:
  region net WIRE_N8: 6004.16,1658.43 5412.16,1658.43 5412.16,1575.84 6004.16,1575.84
  rectangle net WIRE_N7: 5552.95,1809.5 5585.95,1850.91
  rectangle net WIRE_N7: 5474.21,1809.5 5507.21,1850.91
  rectangle net WIRE_N7: 5631.69,1809.5 5664.69,1850.91
  rectangle net WIRE_N7: 5710.43,1809.5 5743.43,1850.91
  rectangle net WIRE_N7: 5789.17,1809.5 5822.17,1850.91
  rectangle net WIRE_N7: 5867.91,1809.5 5900.91,1850.91
  rectangle net WIRE_N7: 5946.65,1809.5 5979.65,1850.91
  region net WIRE_N7: 6004.16,1815.91 5412.16,1815.91 5412.16,1733.32 6004.16,1733.32
  region net WIRE_N5: 6004.16,2170.24 5412.16,2170.24 5412.16,2087.65 6004.16,2087.65
  rectangle net WIRE_N5: 5946.65,2163.83 5979.65,2205.24
  rectangle net WIRE_N5: 5867.91,2163.83 5900.91,2205.24
  rectangle net WIRE_N5: 5789.17,2163.83 5822.17,2205.24
  rectangle net WIRE_N5: 5710.43,2163.83 5743.43,2205.24
  rectangle net WIRE_N5: 5631.69,2163.83 5664.69,2205.24
  rectangle net WIRE_N5: 5474.21,2163.83 5507.21,2205.24
  rectangle net WIRE_N5: 5552.95,2163.83 5585.95,2205.24
  region net WIRE_N6: 6004.16,2012.76 5412.16,2012.76 5412.16,1930.17 6004.16,1930.17
  region net WIRE_N1: 6004.16,2524.57 5412.16,2524.57 5412.16,2441.98 6004.16,2441.98
  rectangle net WIRE_N1: 5946.65,2518.16 5979.65,2559.57
  rectangle net WIRE_N1: 5867.91,2518.16 5900.91,2559.57
  rectangle net WIRE_N1: 5789.17,2518.16 5822.17,2559.57
  rectangle net WIRE_N1: 5710.43,2518.16 5743.43,2559.57
  rectangle net WIRE_N1: 5631.69,2518.16 5664.69,2559.57
  rectangle net WIRE_N1: 5474.21,2518.16 5507.21,2559.57
  rectangle net WIRE_N1: 5552.95,2518.16 5585.95,2559.57
  region net WIRE_N4: 6004.16,2367.09 5412.16,2367.09 5412.16,2284.5 6004.16,2284.5
  region net WIRE_N3: 6004.16,2878.91 5412.16,2878.91 5412.16,2796.31 6004.16,2796.31
  rectangle net WIRE_N3: 5946.65,2872.5 5979.65,2913.91
  rectangle net WIRE_N3: 5867.91,2872.5 5900.91,2913.91
  rectangle net WIRE_N3: 5789.17,2872.5 5822.17,2913.91
  rectangle net WIRE_N3: 5710.43,2872.5 5743.43,2913.91
  rectangle net WIRE_N3: 5631.69,2872.5 5664.69,2913.91
  rectangle net WIRE_N3: 5474.21,2872.5 5507.21,2913.91
  rectangle net WIRE_N3: 5552.95,2872.5 5585.95,2913.91
  region net WIRE_N2: 6004.16,2721.43 5412.16,2721.43 5412.16,2638.83 6004.16,2638.83
  rectangle net WIRE_N4: 5907.28,2367.09 5940.28,2402.09
  rectangle net WIRE_N4: 5828.54,2367.09 5861.54,2402.09
  rectangle net WIRE_N4: 5749.8,2367.09 5782.8,2402.09
  rectangle net WIRE_N4: 5671.06,2367.09 5704.06,2402.09
  rectangle net WIRE_N4: 5592.32,2367.09 5625.32,2402.09
  rectangle net WIRE_N4: 5513.58,2367.09 5546.58,2402.09
  rectangle net WIRE_N4: 5434.84,2367.09 5467.84,2402.09
  rectangle net WIRE_N6: 5907.28,2012.76 5940.28,2047.76
  rectangle net WIRE_N6: 5828.54,2012.76 5861.54,2047.76
  rectangle net WIRE_N6: 5749.8,2012.76 5782.8,2047.76
  rectangle net WIRE_N6: 5671.06,2012.76 5704.06,2047.76
  rectangle net WIRE_N6: 5592.32,2012.76 5625.32,2047.76
  rectangle net WIRE_N6: 5513.58,2012.76 5546.58,2047.76
  rectangle net WIRE_N6: 5434.84,2012.76 5467.84,2047.76
  rectangle net WIRE_N8: 5434.84,1658.43 5467.84,1693.43
  rectangle net WIRE_N8: 5513.58,1658.43 5546.58,1693.43
  rectangle net WIRE_N8: 5592.32,1658.43 5625.32,1693.43
  rectangle net WIRE_N8: 5671.06,1658.43 5704.06,1693.43
  rectangle net WIRE_N8: 5749.8,1658.43 5782.8,1693.43
  rectangle net WIRE_N8: 5828.54,1658.43 5861.54,1693.43
  rectangle net WIRE_N8: 5907.28,1658.43 5940.28,1693.43
  rectangle net WIRE_N2: 5907.28,2721.43 5940.28,2756.43
  rectangle net WIRE_N2: 5828.54,2721.43 5861.54,2756.43
  rectangle net WIRE_N2: 5749.8,2721.43 5782.8,2756.43
  rectangle net WIRE_N2: 5671.06,2721.43 5704.06,2756.43
  rectangle net WIRE_N2: 5592.32,2721.43 5625.32,2756.43
  rectangle net WIRE_N2: 5513.58,2721.43 5546.58,2756.43
  rectangle net WIRE_N2: 5434.84,2721.43 5467.84,2756.43
  text "Mid2" at 6162.57,2570.46 h20
Bottom Layer:
  region net WIRE_N2: 6002.34,2756.45 5969.34,2756.45 5969.34,2715.04 6002.34,2715.04
  region net WIRE_N4: 6002.34,2402.12 5969.34,2402.12 5969.34,2360.71 6002.34,2360.71
  region net WIRE_N6: 6002.34,2047.79 5969.34,2047.79 5969.34,2006.38 6002.34,2006.38
  region net WIRE_N8: 6002.34,1693.46 5969.34,1693.46 5969.34,1652.05 6002.34,1652.05
  rectangle net WIRE_N7: 5412.8,1809.53 5445.8,1850.94
  rectangle net WIRE_N5: 5412.8,2163.86 5445.8,2205.27
  rectangle net WIRE_N1: 5412.8,2518.19 5445.8,2559.6
  rectangle net WIRE_N3: 5412.8,2872.52 5445.8,2913.93
  rectangle net WIRE_N2: 5434.84,2715.02 5467.84,2756.42
  rectangle net WIRE_N2: 5513.58,2715.02 5546.58,2756.42
  rectangle net WIRE_N2: 5592.32,2715.02 5625.32,2756.42
  rectangle net WIRE_N2: 5671.06,2715.02 5704.06,2756.42
  rectangle net WIRE_N2: 5749.8,2715.02 5782.8,2756.42
  rectangle net WIRE_N2: 5828.54,2715.02 5861.54,2756.42
  rectangle net WIRE_N2: 5907.28,2715.02 5940.28,2756.42
  rectangle net WIRE_N3: 5946.65,2872.5 5979.65,2913.91
  rectangle net WIRE_N3: 5867.91,2872.5 5900.91,2913.91
  rectangle net WIRE_N3: 5789.17,2872.5 5822.17,2913.91
  rectangle net WIRE_N3: 5710.43,2872.5 5743.43,2913.91
  rectangle net WIRE_N3: 5631.69,2872.5 5664.69,2913.91
  rectangle net WIRE_N3: 5552.95,2872.5 5585.95,2913.91
  rectangle net WIRE_N3: 5474.21,2872.5 5507.21,2913.91
  rectangle net WIRE_N4: 5434.84,2360.68 5467.84,2402.09
  rectangle net WIRE_N4: 5513.58,2360.68 5546.58,2402.09
  rectangle net WIRE_N4: 5592.32,2360.68 5625.32,2402.09
  rectangle net WIRE_N4: 5671.06,2360.68 5704.06,2402.09
  rectangle net WIRE_N4: 5749.8,2360.68 5782.8,2402.09
  rectangle net WIRE_N4: 5828.54,2360.68 5861.54,2402.09
  rectangle net WIRE_N4: 5907.28,2360.68 5940.28,2402.09
  rectangle net WIRE_N1: 5946.65,2518.17 5979.65,2559.57
  rectangle net WIRE_N1: 5867.91,2518.17 5900.91,2559.57
  rectangle net WIRE_N1: 5789.17,2518.17 5822.17,2559.57
  rectangle net WIRE_N1: 5710.43,2518.17 5743.43,2559.57
  rectangle net WIRE_N1: 5631.69,2518.17 5664.69,2559.57
  rectangle net WIRE_N1: 5552.95,2518.17 5585.95,2559.57
  rectangle net WIRE_N1: 5474.21,2518.17 5507.21,2559.57
  rectangle net WIRE_N6: 5434.84,2006.35 5467.84,2047.76
  rectangle net WIRE_N6: 5513.58,2006.35 5546.58,2047.76
  rectangle net WIRE_N6: 5592.32,2006.35 5625.32,2047.76
  rectangle net WIRE_N6: 5671.06,2006.35 5704.06,2047.76
  rectangle net WIRE_N6: 5749.8,2006.35 5782.8,2047.76
  rectangle net WIRE_N6: 5828.54,2006.35 5861.54,2047.76
  rectangle net WIRE_N6: 5907.28,2006.35 5940.28,2047.76
  rectangle net WIRE_N5: 5946.65,2163.83 5979.65,2205.24
  rectangle net WIRE_N5: 5867.91,2163.83 5900.91,2205.24
  rectangle net WIRE_N5: 5789.17,2163.83 5822.17,2205.24
  rectangle net WIRE_N5: 5710.43,2163.83 5743.43,2205.24
  rectangle net WIRE_N5: 5631.69,2163.83 5664.69,2205.24
  rectangle net WIRE_N5: 5552.95,2163.83 5585.95,2205.24
  rectangle net WIRE_N5: 5474.21,2163.83 5507.21,2205.24
  rectangle net WIRE_N7: 5474.21,1809.5 5507.21,1850.91
  rectangle net WIRE_N7: 5552.95,1809.5 5585.95,1850.91
  rectangle net WIRE_N7: 5631.69,1809.5 5664.69,1850.91
  rectangle net WIRE_N7: 5710.43,1809.5 5743.43,1850.91
  rectangle net WIRE_N7: 5789.17,1809.5 5822.17,1850.91
  rectangle net WIRE_N7: 5867.91,1809.5 5900.91,1850.91
  rectangle net WIRE_N7: 5946.65,1809.5 5979.65,1850.91
  rectangle net WIRE_N8: 5907.28,1652.02 5940.28,1693.43
  rectangle net WIRE_N8: 5828.54,1652.02 5861.54,1693.43
  rectangle net WIRE_N8: 5749.8,1652.02 5782.8,1693.43
  rectangle net WIRE_N8: 5671.06,1652.02 5704.06,1693.43
  rectangle net WIRE_N8: 5592.32,1652.02 5625.32,1693.43
  rectangle net WIRE_N8: 5513.58,1652.02 5546.58,1693.43
  rectangle net WIRE_N8: 5434.84,1652.02 5467.84,1693.43
  text "Bot" at 6166.54,2493.59 h20
Internal Plane 1 (plane layer: these items are gaps in the copper):
  rectangle: 5409.55,1521.47 6018.99,2928.27
  text "Ground plane 1" at 6160.72,2638.86 h20
Internal Plane 2 (plane layer: these items are gaps in the copper):
  rectangle: 5409.55,1521.47 6018.99,2928.27
  text "Ground plane 2" at 6165.85,2533.52 h20

## Silkscreen, mask and mechanical layers (free items; w line width, h text height)
Top Overlay:
  text "McGill" at 5542.52,3060.95 h100
  text "SPT3G Adapter board, Rev 2" at 5465.88,3023.23 h20
  text "Amy Bender    Sept 2015" at 5463.88,2975.73 h20
  text "adamjohngilbert@gmail.com" at 5462.88,2928.23 h20
  text "WIRE 3 +" at 5282.66,2833 h30
  text "WIRE 2 +" at 5282.66,2675.52 h30
  text "WIRE 1 +" at 5282.66,2478.67 h30
  text "WIRE 4 +" at 5282.66,2321.19 h30
  text "WIRE 5 +" at 5282.66,2124.34 h30
  text "WIRE 6 +" at 5282.66,1966.86 h30
  text "WIRE 7 +" at 5282.66,1770.01 h30
  text "WIRE 8 +" at 5282.66,1612.53 h30
Bottom Overlay:
  text "WIRE 3 -" at 5396.45,2833 h30
  text "WIRE 2 -" at 5396.45,2675.52 h30
  text "WIRE 1 -" at 5396.45,2478.67 h30
  text "WIRE 4 -" at 5396.45,2321.19 h30
  text "WIRE 5 -" at 5396.45,2124.34 h30
  text "WIRE 6 -" at 5396.45,1966.86 h30
  text "WIRE 7 -" at 5396.45,1770.01 h30
  text "WIRE 8 -" at 5396.45,1612.53 h30
Mechanical 1:
  lines w20: 6023.43,1558.68 6023.43,2896.85 ; 6025,1558.68 6299.21,1558.68 6299.21,1322.46 ; 6025,2896.85 6299.21,2896.85 6299.21,3133.07 4881.75,3133.07 4881.75,1321.95 6299.21,1321.95
  text "Vias connect Top layer to Mid 1" at 5418.16,2858.09 h20
  text "Vias connect Bop layer to Mid 2" at 5415.16,2802.09 h20

## Dimensions
5371,1818 to 5368,1936 on Mechanical 1
4881.75,1321.95 to 4881.75,3133.07 on Mechanical 1
6112.36,3014.96 to 6299.21,3133.07 on Mechanical 1
6112.36,1440.57 to 6299.21,1322.46 on Mechanical 1
6299.21,3133.07 to 6300,2896.85 on Mechanical 1
6112.36,3014.96 to 6112.36,1440.57 on Mechanical 1
6023.43,1558.68 to 6299.21,1558.68 on Mechanical 1
4881.75,3133.07 to 6299.21,3133.07 on Mechanical 1
5415,2925 to 6005,2905 on Mechanical 1
5384,2798 to 5389,2878 on Mechanical 1
5402,2365 to 5407,2445 on Mechanical 1